# Altium PCB lorabreakout.PcbDoc
Units mm, origin at the board's own origin, x right, y up, seen from the top; angles counter-clockwise.
Board outline 40.64 x 25.4 mm, 2 copper layers (Top Layer, Bottom Layer); 29 components, 47 nets, 161 pads, 19 vias.
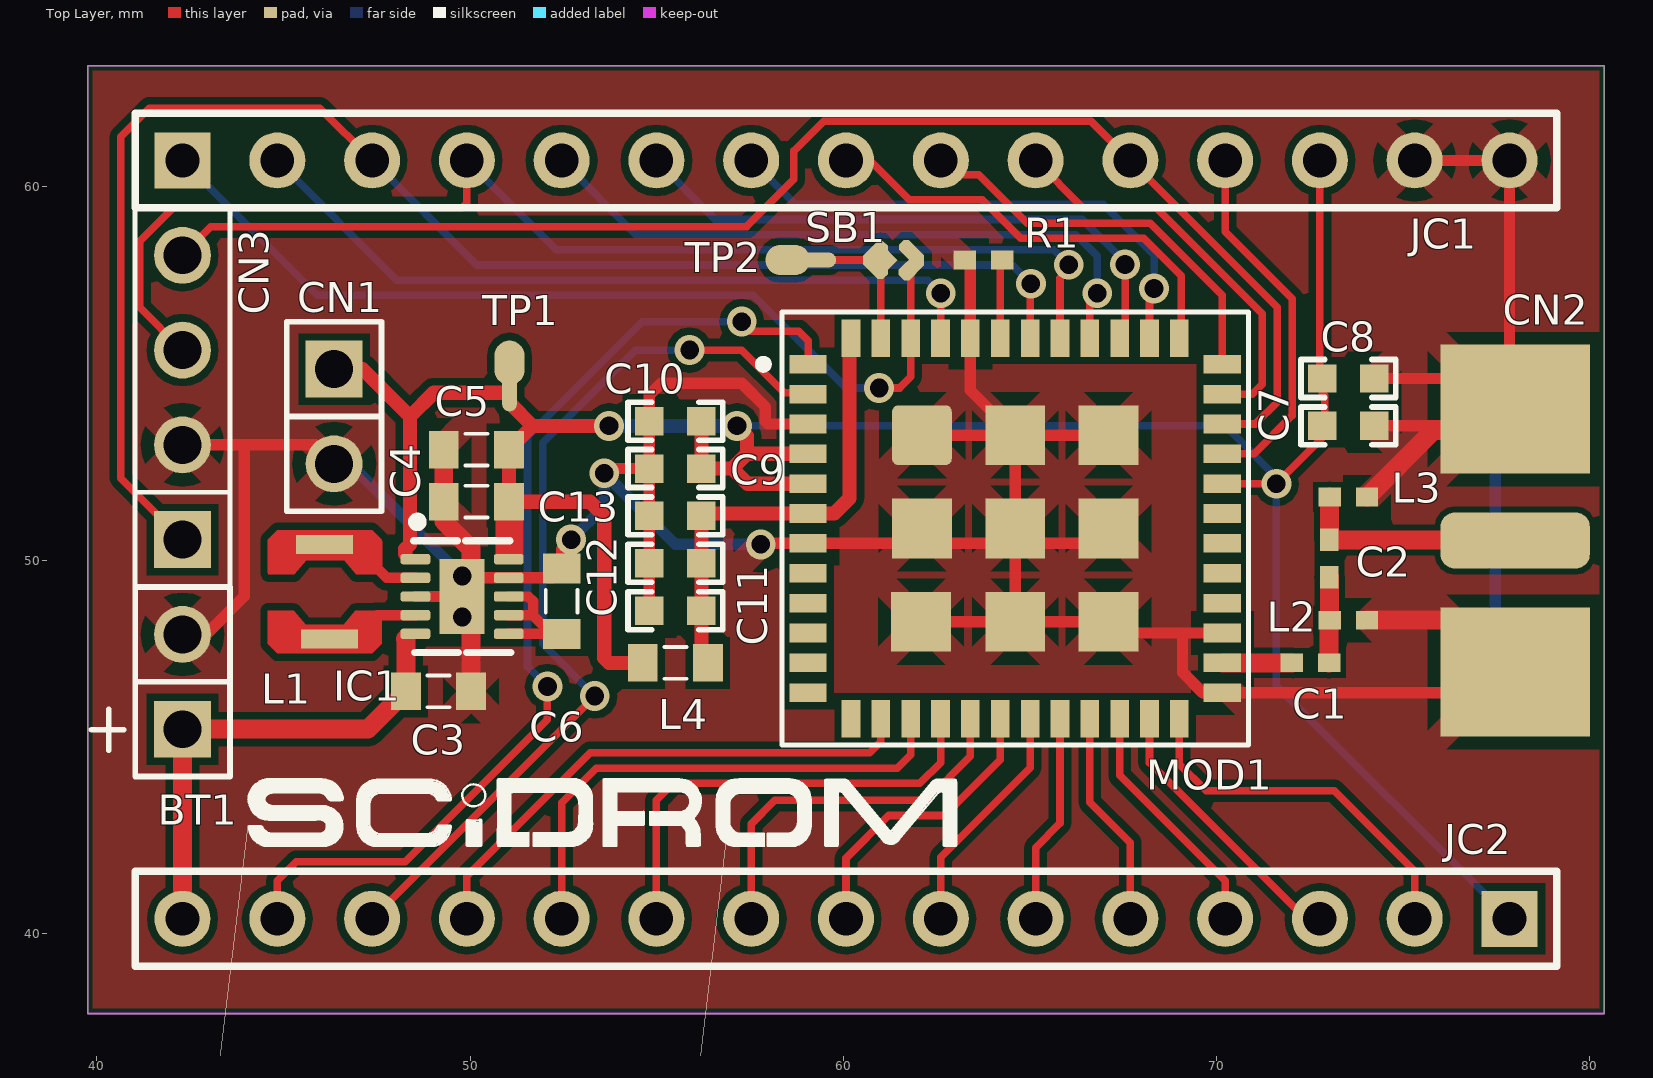
[diagram p0: Top Layer view]
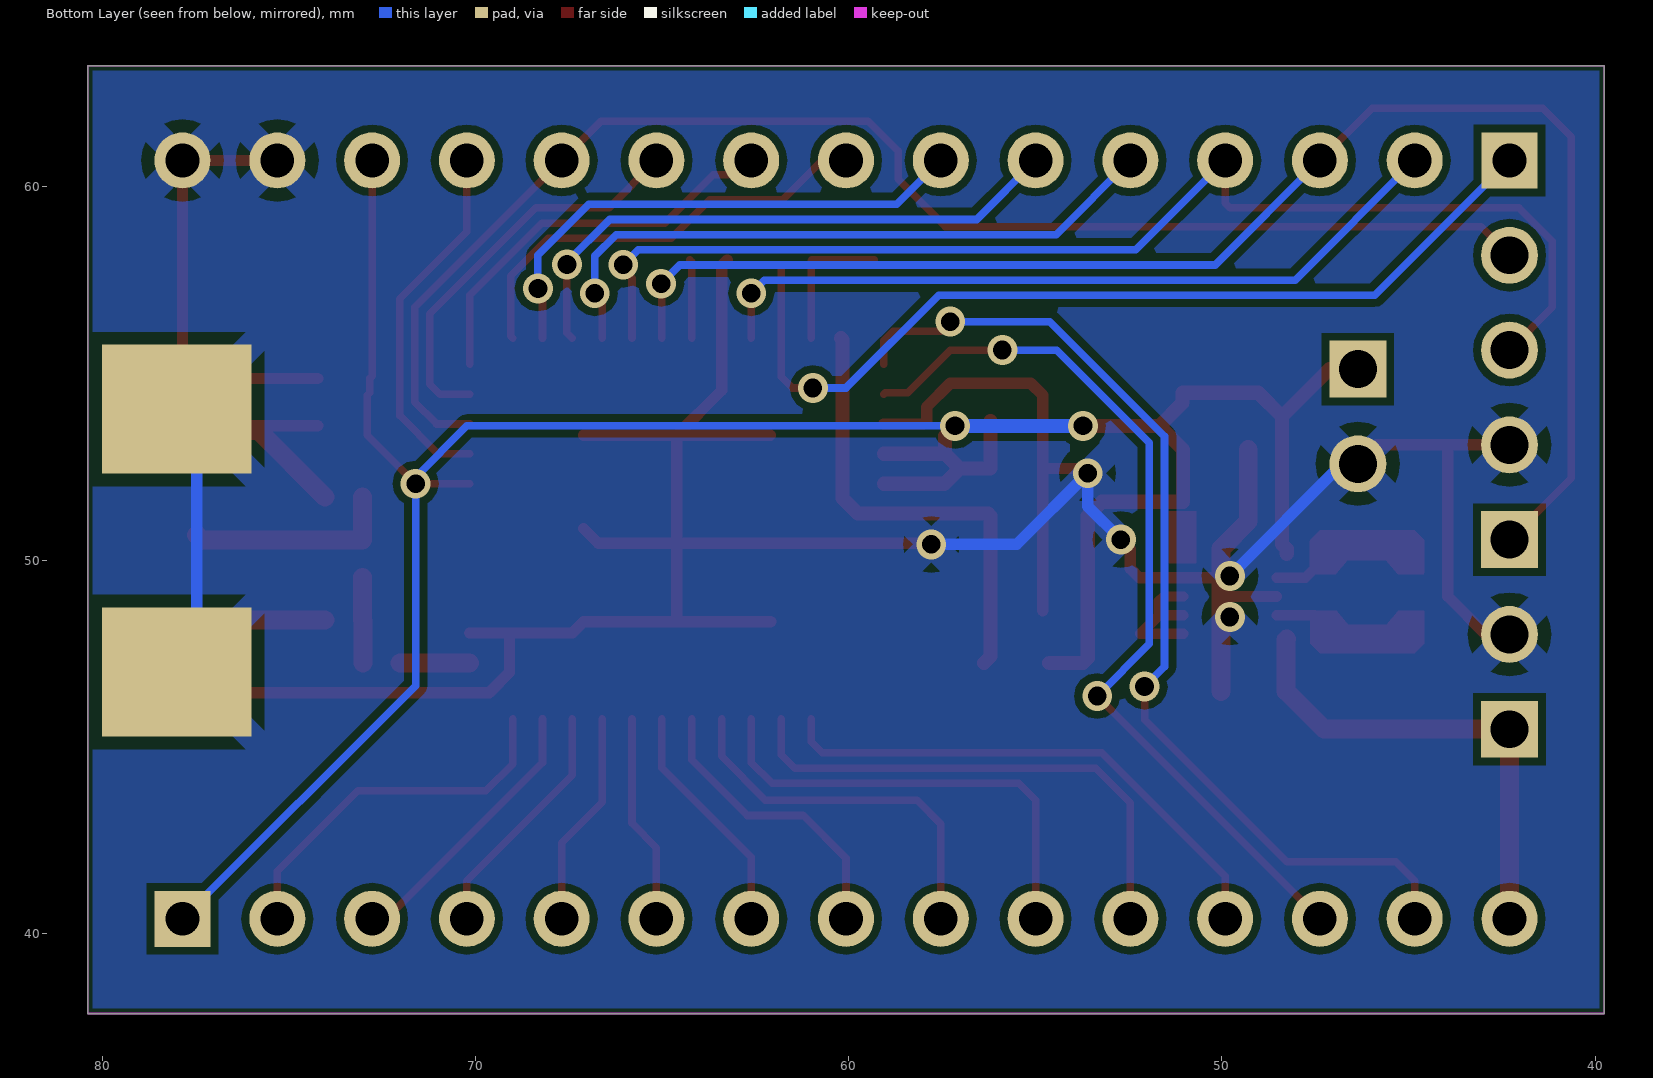
[diagram p1: Bottom Layer view, seen from below]

## Layer stack, top to bottom
Top Solder: solder mask 0.0102, Solder Resist, Dk 3.5
Top Layer: signal copper 0.0356
Dielectric 1: dielectric 0.32, FR-4, Dk 4.8
Bottom Layer: signal copper 0.0356
Bottom Solder: solder mask 0.0102, Solder Resist, Dk 3.5

## Board outline
80.391,37.846 39.751,37.846 39.751,63.246 80.391,63.246

## Design rules (kind name [scope] priority, off if disabled: settings)
Clearance "Schematic Clearance Constraint" [InNetClass('50R')] p1: gap=0.157
Clearance [All vs InNetClass('rfnets')] p2: gap=2
Clearance ClearanceEdge [All vs OnLayer('Keep-Out Layer')] p3: gap=0.102
Clearance Clearance-all [All] p4: gap=0.203
ComponentClearance [All] p1 off: gap=0.254 collisioncheckmode=3 verticalgap=0.254 showdistances=FALSE
HoleSize [All] p1: absolutevalues=TRUE maxlimit=6 minlimit=0.3 maxpercent=80.000 minpercent=20.000
HoleToHoleClearance [All] p1: gap=0.127 allowstackedmicrovias=TRUE
MinimumAnnularRing [All] p1: minimumring=0.15
MinimumSolderMaskSliver SilkscreenOverComponentPads [All] p2: minsoldermaskwidth=0.254
PolygonConnect [All] p1: connectstyle=Relief reliefconductorwidth=0.7 reliefentries=4 polygonreliefangle="45 Angle" airgapwidth=0.35
RoutingVias [All] p1: holewidth=0.711 width=1.27 viastyle="Through Hole" minholewidth=0.1 minwidth=0.5 maxholewidth=333 maxwidth=333
SolderMaskExpansion [All] p1: expansion=0.102
Width [All] p1: maxlimit=12.7 minlimit=0.203 preferedwidth=0.254
27 further rules are at their usual default settings.

## Classes and differential pairs
net class 50R: ANT NetC1_2 NetC2_2

## Components (designator, comment, footprint, x,y, rotation, side; value= is the part's Value field where it differs from the comment)
BT1 "Battery" SIP2 42.291,45.466 r90 top
C1 "" 0402 72.517,47.244 r0 top
C2 "" 0402 73.025,50.038 r90 top
C3 "cap" 0603ok 49.149,46.482 r180 top
C4 "cap" 0603ok 50.165,51.562 r0 top
C5 "cap" 0603ok 50.165,52.959 r0 top
C6 "cap" 0603ok 52.451,48.895 r270 top
C7 "10µF" 0603C 73.533,53.594 r180 top
C8 "100nF" 0603C 73.533,54.864 r0 top
C9 "10µF" 0603C 55.499,52.451 r0 top
C10 "100nF" 0603C 55.499,53.721 r180 top
C11 "10µF" 0603C 55.499,48.641 r0 top
C12 "1uF" 0603C 55.499,49.911 r180 top
C13 "100nF" 0603C 55.499,51.181 r180 top
CN1 "External 3V3" SIP2 46.355,55.118 r270 top
CN2 "SMA" SMA_COMBO_B 75.082,50.521 r180 top (schematic designator CN1)
CN3 "Header 4" SIP4 42.291,50.546 r90 top
IC1 "TPS63031DSKT" QFN50P250X250X80_HS-11N 49.784,49.022 r0 top
JC1 "Header 15" HDR1X15 42.291,60.706 r0 top locked
JC2 "Header 15" HDR1X15 77.851,40.386 r180 top
L1 "Inductor" lps3015 47.625,47.498 r90 top
L2 "" 0402 73.533,48.387 r180 top
L3 "" 0402 73.533,51.689 r180 top
L4 "BLM..." 0603ok 55.499,47.244 r0 top
MOD1 "LRA Module Murata" "Lora Module ES0" 59.055,55.245 r0 top
R1 "Res2" 0402 63.754,58.039 r0 top
SB1 "Circuit Breaker" JP2_SMD 61.341,58.039 r180 top
TP1 "3V3" SMD-MINITP 51.054,54.483 r270 top
TP2 "TCXO" SMD-MINITP 59.309,58.039 r0 top

## Footprints (in the part's own frame and the unit in brackets; to place one, negate y for a bottom-side part, rotate by r counter-clockwise, add the part's x,y. Pads: shape width x height; smd on the part's side, far side on the other; paste and mask are expansions set on the pad)
0402 [mm] "Chip Capacitor, Body 1.0x0.5mm, IPC High Density"
  rect 0.6x0.5 smd: 1(-0.5,0) 2(0.5,0)
  body extent -0.55,-0.3 0.55,0.3, height 1.3
0603C [mil]
  rect 30x30 smd: 1(27.5,0) 2(-27.5,0)
  silkscreen extent -50,-20 50,20
0603ok [mm]
  rect 0.8x1 smd paste+0 mask+0.102: 1(-0.873,0) 2(0.873,0)
  silkscreen extent -0.3,-0.43 0.3,0.43, body extent -0.8,-0.4 0.8,0.4, height 0.45
HDR1X15 [mm] "Connector; Header; 15 Position"
  rect 1.5x1.5 hole 0.9: 1(0,0)
  round 1.5 hole 0.9: 2(2.54,0) 3(5.08,0) 4(7.62,0) 5(10.16,0) 6(12.7,0) 7(15.24,0) 8(17.78,0) 9(20.32,0) 10(22.86,0) 11(25.4,0) 12(27.94,0) 13(30.48,0) 14(33.02,0) 15(35.56,0)
  silkscreen extent -1.27,-1.27 36.83,1.27
JP2_SMD [mil]
  oct 15x30 smd rot 45: 1(-19,-8) 2(19,7)
  oct 15.75x30 smd rot 135: 1(-19,8)
  rect 26x26 smd rot 45: 2(14,0)
  oct 15x30 smd rot 135: 2(19,-7)
"Lora Module ES0" [mm]
  rect 1x0.5 smd: 1(0,0) 2(0,-0.8) 3(0,-1.6) 4(0,-2.4) 5(0,-3.2) 6(0,-4) 7(0,-4.8) 8(0,-5.6) 9(0,-6.4) 10(0,-7.2) 11(0,-8) 12(0,-8.8) 25(11.1,-8.8) 26(11.1,-8) 27(11.1,-7.2) 28(11.1,-6.4) 29(11.1,-5.6) 30(11.1,-4.8) 31(11.1,-4) 32(11.1,-3.2) 33(11.1,-2.4) 34(11.1,-1.6) 35(11.1,-0.8) 36(11.1,0)
  rect 0.5x1 smd: 13(1.15,-9.5) 14(1.95,-9.5) 15(2.75,-9.5) 16(3.55,-9.5) 17(4.35,-9.5) 18(5.15,-9.5) 19(5.95,-9.5) 20(6.75,-9.5) 21(7.55,-9.5) 22(8.35,-9.5) 23(9.15,-9.5) 24(9.95,-9.5) 37(9.95,0.7) 38(9.15,0.7) 39(8.35,0.7) 40(7.55,0.7) 41(6.75,0.7) 42(5.95,0.7) 43(5.15,0.7) 44(4.35,0.7) 45(3.55,0.7) 46(2.75,0.7) 47(1.95,0.7) 48(1.15,0.7)
  rrect20% 1.6x1.6 smd: 49(3.05,-1.9)
  rect 1.6x1.6 smd: 50(5.55,-1.9) 51(8.05,-1.9) 52(3.05,-4.4) 53(5.55,-4.4) 54(8.05,-4.4) 55(3.025,-6.9) 56(5.55,-6.9) 57(8.05,-6.9)
  silkscreen extent -1.3,-10.2 11.8,1.4, body extent -0.71,-10.2 11.79,1.4, height 1.76
lps3015 [mil]
  rect 20x60 smd: 1(15,55) 2(115,60)
  Top Layer region: 120,0 130,10 130,110 120,120 85,120 85,92.5 100,80 100,40 85,27.5 85,0
  Top Layer region: 10,120 0,110 0,10 10,0 45,0 45,27.5 30,40 30,80 45,92.5 45,120
  Top Layer region: 118.43,-0.63 128.43,9.37 128.43,109.37 118.43,119.37 83.43,119.37 83.43,91.87 98.43,79.37 98.43,39.37 83.43,26.87 83.43,-0.63
  body extent 3,-2 127,122, height 59
QFN50P250X250X80_HS-11N [mm] "QFN, 10-Leads, Body 2,50x2,50mm, Pitch 0,50mm, Thermal Pad 2,00x1,20mm, IPC Medium Density"
  rrect50% 0.8x0.279 smd: 1(-1.25,1) 2(-1.25,0.5) 3(-1.25,0) 4(-1.25,-0.5) 5(-1.25,-1) 6(1.25,-1) 7(1.25,-0.5) 8(1.25,0) 9(1.25,0.5) 10(1.25,1)
  rect 1.2x2 smd: 11(0,0)
  silkscreen extent -1.32,-1.5 1.3,2.12, body extent -1.3,-1.3 1.3,1.3, height 0.8
SIP2 [mil]
  rect 60x60 hole 40: 1(0,0)
  round 60 hole 40: 2(100,0)
  silkscreen extent -50,-50 150,50
SIP4 [mil]
  rect 60x60 hole 40: 1(0,0)
  round 60 hole 40: 2(100,0) 3(200,0) 4(300,0)
  silkscreen extent -50,-50 350,50
SMA_COMBO_B [mm]
  rrect50% 4x1.5 smd: 1(-2.921,0)
  rect 4x2 smd: 2(-2.921,2.794) 2(-2.921,4.25) 2(-2.921,-4.25) 2(-2.921,-2.794)
  rect 4x2 smd far side: 2(-2.921,2.794) 2(-2.921,4.25) 2(-2.921,-4.25) 2(-2.921,-2.794)
SMD-MINITP [mm]
  oval 1.2x0.8 smd paste+0 mask+0.05: 1(-0.8,0)
  oval 1x0.4 smd paste+0 mask+0.05: 1(0,0)

## Part data
BT1: "Multicell Battery"
C1 C2: library part "CAP SMD 0402 NPO 18PF 16V 5%", "0402"
C3 C4 C5 C6: "Capacitor"
C7 C9 C11: library part CAP_C0805C106K8RACTU, "Capacitor SMD 0805 10000000pF X7R 10V +/-10%"
C8 C10 C13: library part CAP, "Capacitor 100nF"
C12: library part "CAP SMD 0603  X5R 1µF 25V 10%", "0603  X5R 1µF"
CN1: library part "Header 2", "Header 2"
CN3: "Header, 4-Pin, Single row"
JC1 JC2: "Header, 15-Pin"
L2 L3: library part BLM15HG102SN1D
L4: library part BLM15HG102SN1D, "BLM15HG102SN1D"
MOD1: library part "LRA Module ES0", "LRA Module ES0"
R1: "2k2"
TP1 TP2: library part Testpoint

## Free pads (board coordinates)
  round 0.56 on Top Overlay paste+0 mask+0.05: 12(50.094,43.691)

## Via types
v1: diameter 0.8, hole 0.5, Top Layer to Bottom Layer, tented both sides, 19 vias

## Nets (pads, with @x,y where several pads share a name; then routed paths per layer and width w, separated by ;. In a path a pad name is that pad's centre, name@x,y a point inside that pad or via, vN(x,y) a via of type N, cw(c..) or ccw(c..) an arc to the next point about the centre after c; other vN are vias at no path point)
ANT: C1.1 MOD1.26 | length 1.9
  Top Layer w0.508: MOD1.26 C1.1 C1.1
BAT+: BT1.1 C3.2 IC1.5 JC2.15 | length 12.9
  Top Layer w0.508: JC2.15 BT1.1 47.26,45.466 C3.2 48.276,47.863 48.26,47.879
BOOT0: MOD1.43 R1.2 | length 2.1
  Top Layer w0.203: MOD1.43 64.205,57.99 R1.2
CRF1: MOD1.28
CRF2: MOD1.30
CRF3: MOD1.29
GND: BT1.2 C3.1 C4.1 C5.1 C6.1 C7.2 C8.1 C9.2 C10.1 C11.2 C12.1 C13.1 CN1.2 CN2.2 CN3.2 IC1.3 IC1.9 IC1.11 JC1.14 JC1.15 L2.1 L3.1 MOD1.3 MOD1.7 MOD1.25 MOD1.27 MOD1.44 MOD1.49 MOD1.50 MOD1.51 MOD1.52 MOD1.53 MOD1.54 MOD1.55 MOD1.56 MOD1.57 R1.1 | length 117.1
  Top Layer w0.305: BT1.2 42.926,48.006 43.942,49.022 43.942,53.086 ; CN3.2 43.942,53.086 ; CN1.2 45.847,53.086 43.942,53.086 ; IC1.3 IC1.11 ; v1(49.784,49.572) 49.834,49.522 50.022,49.522 IC1.9 52.205,49.522 C6.1 52.451,50.292 v1(52.705,50.546) ; v1(53.594,52.324) 53.721,52.451 C9.2 ; C11.2 C9.2 ; v1(57.785,50.419) 57.811,50.445 MOD1.7 MOD1.53@64.605,50.445 ; MOD1.3 57.988,53.645 57.912,53.721 57.912,54.102 57.277,54.737 55.118,54.737 54.8,54.419 C10.1 C9.2 ; MOD1.55 MOD1.56 ; MOD1.49 MOD1.50 ; R1.1 63.405,57.888 MOD1.44 63.405,54.545 MOD1.50 ; MOD1.54 66.705,50.445 MOD1.53@64.605,50.445 ; MOD1.51 MOD1.50 ; MOD1.27 69.088,48.045 ; C7.2 77.343,53.594 CN2.2@77.47,53.467 ; C8.1 77.411,54.864 77.47,54.923 77.851,55.304 JC1.15 JC1.14 ; CN2.2@77.47,46.423 77.448,46.445 MOD1.25 69.633,46.445 69.088,46.99 69.088,48.045 ; MOD1.56 MOD1.57 67.405,48.045 69.088,48.045 ; MOD1.56 MOD1.53@64.605,50.445 ; MOD1.53@64.605,50.445 MOD1.50
  Top Layer w0.508: C5.1 C4.1 49.292,51.038 50.022,50.308 50.022,49.522 C3.1 ; L2.1 76.962,48.387 CN2.2@77.47,47.879 ; L3.1 75.811,53.467 CN2.2@77.47,53.467
  Bottom Layer w0.305: CN1.2 46.778,52.578 v1(49.784,49.572) ; v1(52.705,50.546) 53.594,51.435 v1(53.594,52.324) 55.499,50.419 v1(57.785,50.419) ; CN2.2@77.47,47.879 CN2.2@77.47,53.467
  other v1: 49.784,48.472
MCU_NRST: CN3.4 JC1.11 MOD1.34 | length 37.6
  Top Layer w0.203: CN3.4 43.053,58.928 57.404,58.928 58.674,60.198 58.674,60.96 59.475,61.761 66.636,61.761 JC1.11 71.628,56.769 71.628,54.229 71.044,53.645 MOD1.34
NetC1_2: C1.2 C2.1 L2.2 | length 2.3
  Top Layer w0.508: C1.2 73.017,48.371 L2.2 73.033,49.53 C2.1
NetC2_2: C2.2 CN2.1 L3.2 | length 5.7
  Top Layer w0.508: L3.2 73.025,51.681 C2.2 77.335,50.538 CN2.1@77.47,50.673
NetC6_2: C6.2 IC1.6 IC1.7 IC1.8 | length 3.6
  Top Layer w0.279: IC1.6 51.816,48.022 52.181,48.022 51.681,48.522 ; IC1.7 51.681,48.522 ; IC1.8 51.562,49.022 51.689,48.895 51.689,48.53 51.681,48.522
NetIC1_2: IC1.2 L1.2 | length 1.3
  Top Layer w0.279: 47.371,49.911 47.76,49.522 IC1.2
NetIC1_4: IC1.4 L1.1 | length 1.2
  Top Layer w0.279: 47.371,48.387 47.506,48.522 IC1.4
PA0: JC1.12 MOD1.33 | length 9.9
  Top Layer w0.203: MOD1.33 71.006,52.845 72.034,53.873 72.034,56.998 70.231,58.801 JC1.12
PA2: JC2.2 MOD1.24 | length 10
  Top Layer w0.203: MOD1.24 69.005,44.533 69.723,43.815 73.152,43.815 75.311,41.656 JC2.2
PA3: JC2.3 MOD1.23 | length 7.5
  Top Layer w0.203: MOD1.23 68.205,44.571 72.39,40.386 JC2.3
PA4: JC2.4 MOD1.22 | length 6.5
  Top Layer w0.203: MOD1.22 67.405,44.228 70.231,41.402 JC2.4
PA5: JC2.5 MOD1.21 | length 5.8
  Top Layer w0.203: MOD1.21 66.605,43.504 67.691,42.418 JC2.5
PA8: JC2.6 MOD1.20 | length 5.6
  Top Layer w0.203: JC2.6 65.151,42.291 65.805,42.945 MOD1.20
PA9: JC2.7 MOD1.19 | length 6.4
  Top Layer w0.203: JC2.7 62.611,42.037 65.005,44.431 MOD1.19
PA10: JC2.8 MOD1.18 | length 7.9
  Top Layer w0.203: JC2.8 60.071,42.012 61.214,43.155 62.713,43.155 64.205,44.647 MOD1.18
PA11: JC2.13 MOD1.2 | length 24.4
  Top Layer w0.203: JC2.13 v1(53.34,46.355) ; v1(55.88,55.626) 57.277,55.626 58.42,54.483 59.017,54.483 MOD1.2
  Bottom Layer w0.203: v1(53.34,46.355) 51.943,47.752 51.943,53.146 54.423,55.626 v1(55.88,55.626)
PA12: JC2.14 MOD1.1 | length 27.5
  Top Layer w0.203: JC2.14 44.831,41.402 45.339,41.91 48.26,41.91 52.07,45.72 v1(52.07,46.609) ; v1(57.277,56.388) 57.531,56.134 58.801,56.134 59.055,55.88 MOD1.1
  Bottom Layer w0.203: v1(52.07,46.609) 51.537,47.142 51.537,53.315 54.61,56.388 v1(57.277,56.388)
PA13: CN3.3 JC1.4 MOD1.41 | length 33.1
  Top Layer w0.203: CN3.3 41.148,56.769 41.148,58.547 42.037,59.436 49.784,59.436 49.911,59.563 JC1.4 ; MOD1.41 65.805,57.55 66.04,57.785 v1(66.04,57.912)
  Bottom Layer w0.203: JC1.4 52.305,58.312 65.64,58.312 v1(66.04,57.912)
PA14: CN3.1 JC1.3 MOD1.42 | length 39.7
  Top Layer w0.203: CN3.1 40.64,52.197 40.64,61.341 41.402,62.103 45.974,62.103 JC1.3 ; MOD1.42 65.005,57.131 65.151,57.277 v1(65.024,57.404)
  Bottom Layer w0.203: JC1.3 50.171,57.906 64.522,57.906 v1(65.024,57.404)
PB2: JC1.8 MOD1.37 | length 12
  Top Layer w0.203: JC1.8 60.706,60.706 61.761,59.651 63.726,59.651 64.754,58.623 68.05,58.623 69.051,57.621 69.051,55.991 MOD1.37
PB5: JC1.5 MOD1.40 | length 17.8
  Top Layer w0.203: MOD1.40 66.605,57.08 66.675,57.15 v1(66.802,57.15)
  Bottom Layer w0.203: JC1.5 54.439,58.718 66.23,58.718 66.802,58.147 v1(66.802,57.15)
PB6: JC1.6 MOD1.39 | length 15.8
  Top Layer w0.203: MOD1.39 67.549,56.089 v1(67.549,57.918)
  Bottom Layer w0.203: JC1.6 56.572,59.125 66.399,59.125 67.549,57.975 v1(67.549,57.918)
PB7: JC1.7 MOD1.38 | length 14.1
  Top Layer w0.203: MOD1.38 68.205,57.156 v1(68.326,57.277)
  Bottom Layer w0.203: JC1.7 58.706,59.531 66.961,59.531 68.326,58.166 v1(68.326,57.277)
PB8: JC1.10 MOD1.35 | length 10.8
  Top Layer w0.203: JC1.10 66.421,59.436 68.386,59.436 71.222,56.601 71.222,54.712 70.955,54.445 MOD1.35
PB9: JC1.9 MOD1.36 | length 10.9
  Top Layer w0.203: JC1.9 62.992,60.325 63.627,60.325 64.922,59.03 68.218,59.03 70.155,57.093 MOD1.36
PB12: JC2.9 MOD1.17 | length 10.2
  Top Layer w0.203: JC2.9 57.531,42.926 58.166,43.561 62.23,43.561 63.405,44.736 MOD1.17
PB13: JC2.10 MOD1.16 | length 12.4
  Top Layer w0.203: JC2.10 54.991,43.561 55.448,44.018 62.052,44.018 62.605,44.571 MOD1.16
PB14: JC2.11 MOD1.15 | length 14
  Top Layer w0.203: JC2.11 52.451,43.494 53.381,44.425 61.443,44.425 61.805,44.787 MOD1.15
PB15: JC2.12 MOD1.14 | length 14.3
  Top Layer w0.203: JC2.12 49.911,41.529 53.213,44.831 60.706,44.831 61.005,45.13 MOD1.14
PH0: JC1.1 MOD1.46 SB1.1 | length 25.1
  Top Layer w0.203: v1(60.96,54.61) 61.507,54.61 61.805,54.908 MOD1.46 61.805,57.817 SB1.1@61.824,57.836
  Bottom Layer w0.203: JC1.1 45.904,57.093 57.588,57.093 60.071,54.61 v1(60.96,54.61)
PH1: JC1.2 MOD1.45 | length 20.5
  Top Layer w0.203: MOD1.45 62.605,57.144 v1(62.611,57.15)
  Bottom Layer w0.203: JC1.2 48.038,57.499 62.262,57.499 v1(62.611,57.15)
STSAFE_NRST: MOD1.31
SX1276_DIO0: MOD1.13
SX1276_DIO1: MOD1.12
SX1276_DIO2: MOD1.8
SX1276_DIO3: MOD1.9
SX1276_DIO4: MOD1.10
SX1276_DIO5: MOD1.11
TCXO_OUT: MOD1.47 SB1.2 TP2.1 | length 3.8
  Top Layer w0.203: TP2.1@59.309,58.039 60.985,58.039 61.005,58.019 MOD1.47
VDD_MCU_LRA: C4.2 C5.2 C7.1 C8.2 C9.1 C10.2 CN1.1 IC1.1 IC1.10 JC1.13 JC2.1 L4.1 MOD1.4 MOD1.5 MOD1.32 TP1.1 | length 73.3
  Top Layer w0.203: MOD1.32 v1(71.603,52.045) 72.898,53.34 72.898,54.42 72.835,54.483 C8.2 72.771,54.928 JC1.13
  Top Layer w0.381: CN1.1 47.117,55.118 48.387,53.848 ; 48.26,50.165 48.26,50.292 48.387,50.419 48.387,53.848 ; v1(53.721,53.594) 51.673,53.594 ; L4.1 53.721,47.244 53.594,47.371 53.594,51.181 53.213,51.562 C4.2 C5.2 51.673,53.594 ; C10.2 C9.1 57.023,52.451 ; v1(57.15,53.594) 57.417,53.327 57.417,52.845 ; MOD1.5 57.429,52.045 57.023,52.451 ; MOD1.4 57.417,52.845 ; 48.387,53.848 49.022,54.483 51.054,54.483 51.054,54.213 51.673,53.594 ; 57.023,52.451 57.417,52.845
  Bottom Layer w0.203: v1(57.15,53.594) 70.231,53.594 71.628,52.197 71.603,52.172 v1(71.603,52.045) 71.603,46.634 JC2.1
  Bottom Layer w0.381: v1(53.721,53.594) v1(57.15,53.594)
VDD_RF_LRA: C11.1 C12.2 C13.2 L4.2 MOD1.6 MOD1.48 | length 12.5
  Top Layer w0.381: L4.2 56.197,47.419 C11.1 C12.2 C13.2 56.262,51.245 MOD1.6 59.754,51.245 60.166,51.657 60.166,55.906 MOD1.48

## Polygon pours and split planes (outlines as drawn)
GND on Top Layer "GND" (solid, remove dead copper, pour order 0): 39.751,37.846 80.391,37.846 80.391,63.246 39.751,63.246
GND on Bottom Layer "GND" (solid, remove dead copper, pour order 2): 39.751,63.246 80.391,63.246 80.391,37.846 39.751,37.846

## Keep-outs
Keep-Out Layer:
  lines w0.05: 39.751,37.846 80.391,37.846 80.391,63.246 79.121,63.246 39.751,63.246 39.751,37.846

## Other copper
Top Layer:
  rectangle net VDD_MCU_LRA: 50.673,49.911 51.435,51.308
  region: 49.822,43.562
  region: 49.822,43.562

## Silkscreen, mask and mechanical layers (free items; w line width, h text height)
Top Overlay:
  drawing of 846 lines, arcs and shapes, not listed